# Altium PCB PIC-ENCODER.PcbDoc
Units mm, origin at the board's own origin, x right, y up, seen from the top; angles counter-clockwise.
Board outline 95.12 x 67.48 mm, 2 copper layers (Top Layer, Bottom Layer); 10 components, 14 nets, 83 pads, 0 vias.
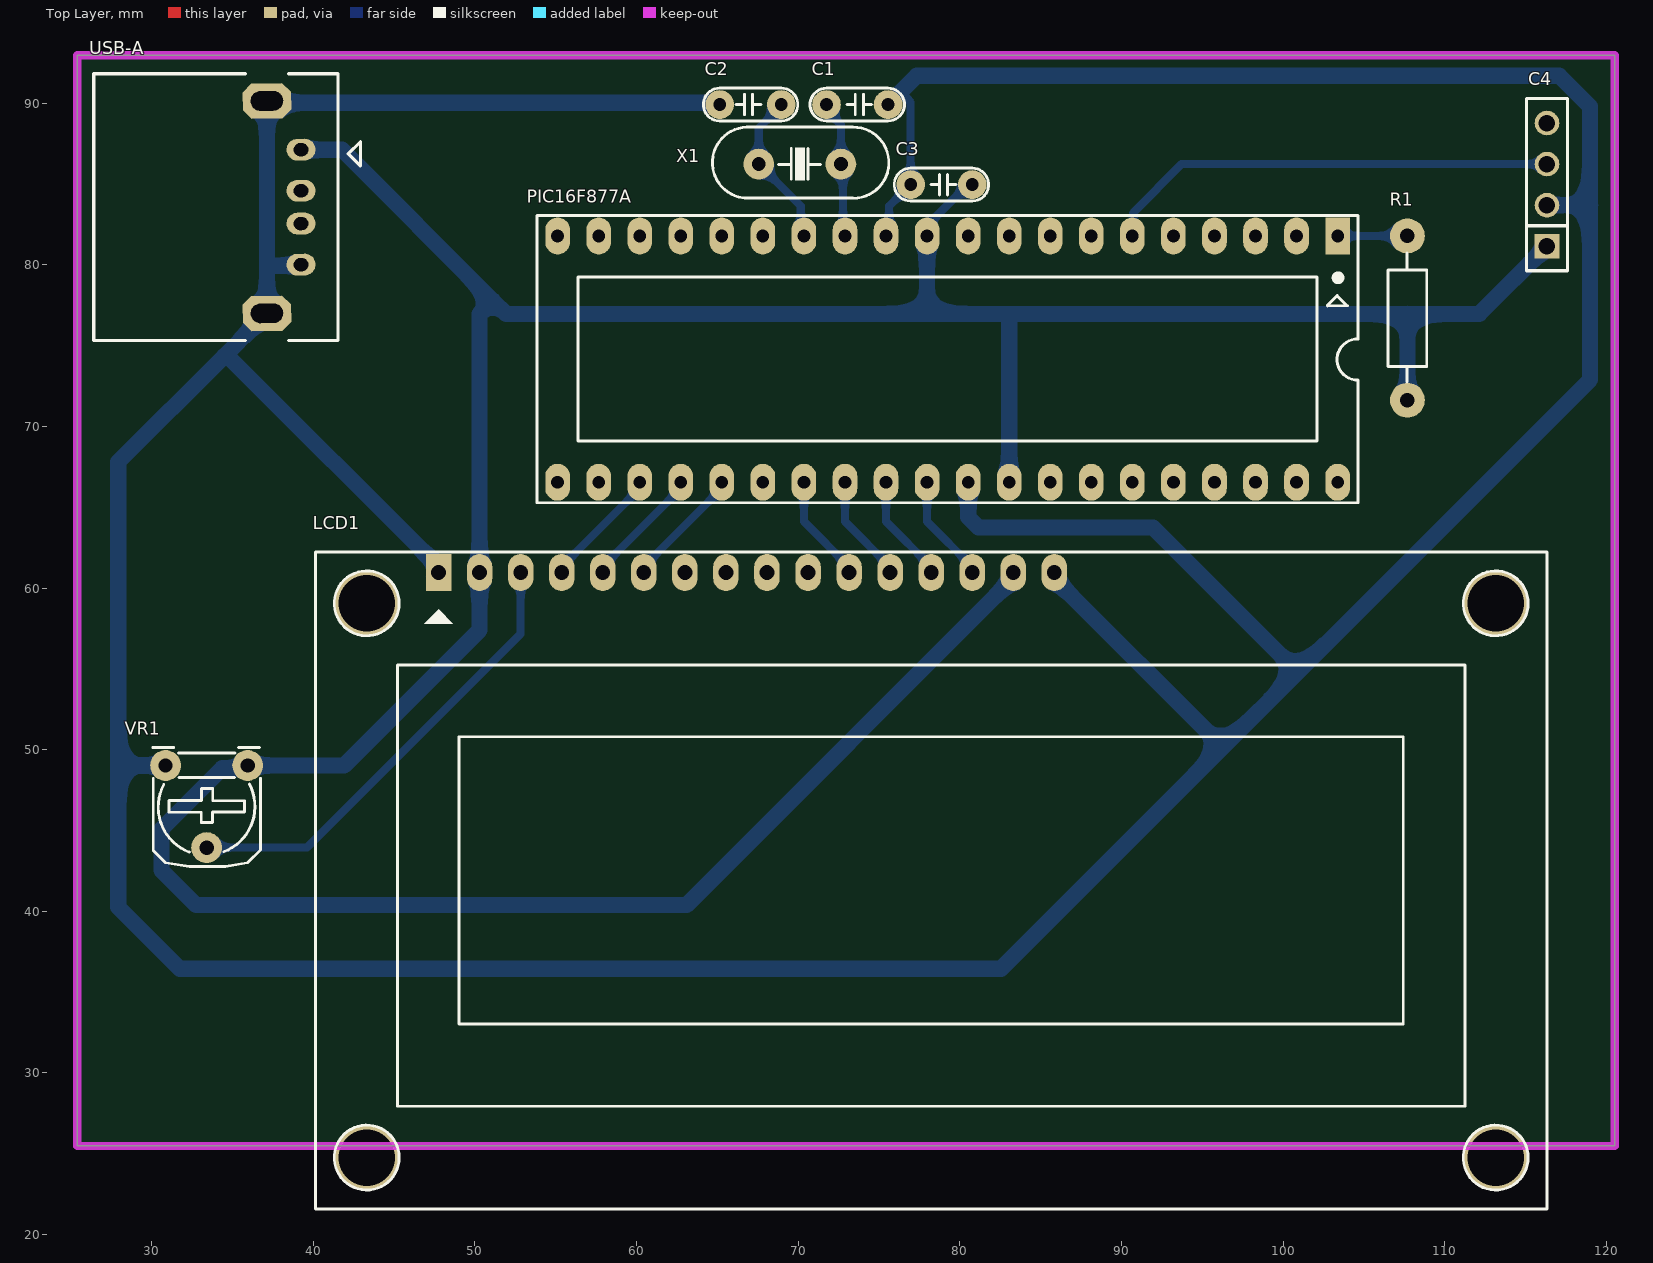
[diagram p0: Top Layer view]
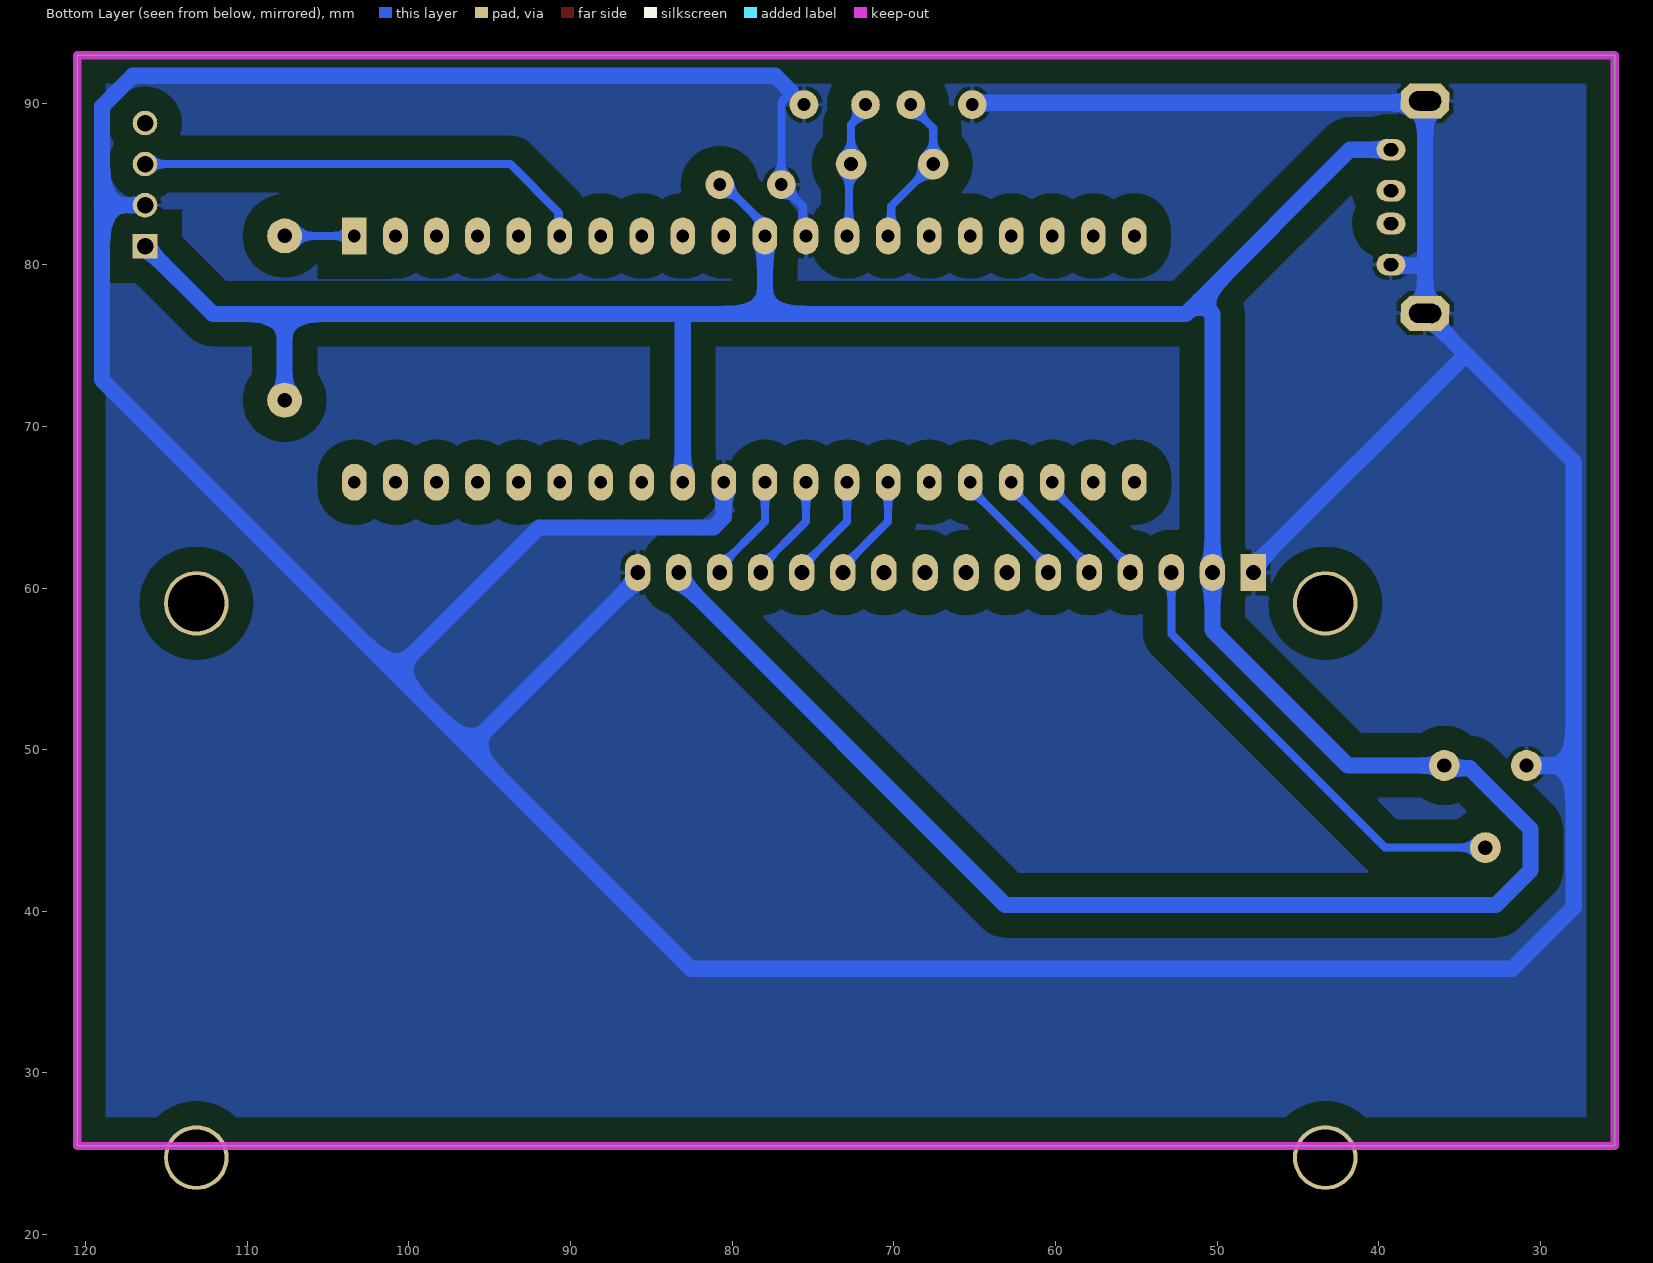
[diagram p1: Bottom Layer view, seen from below]
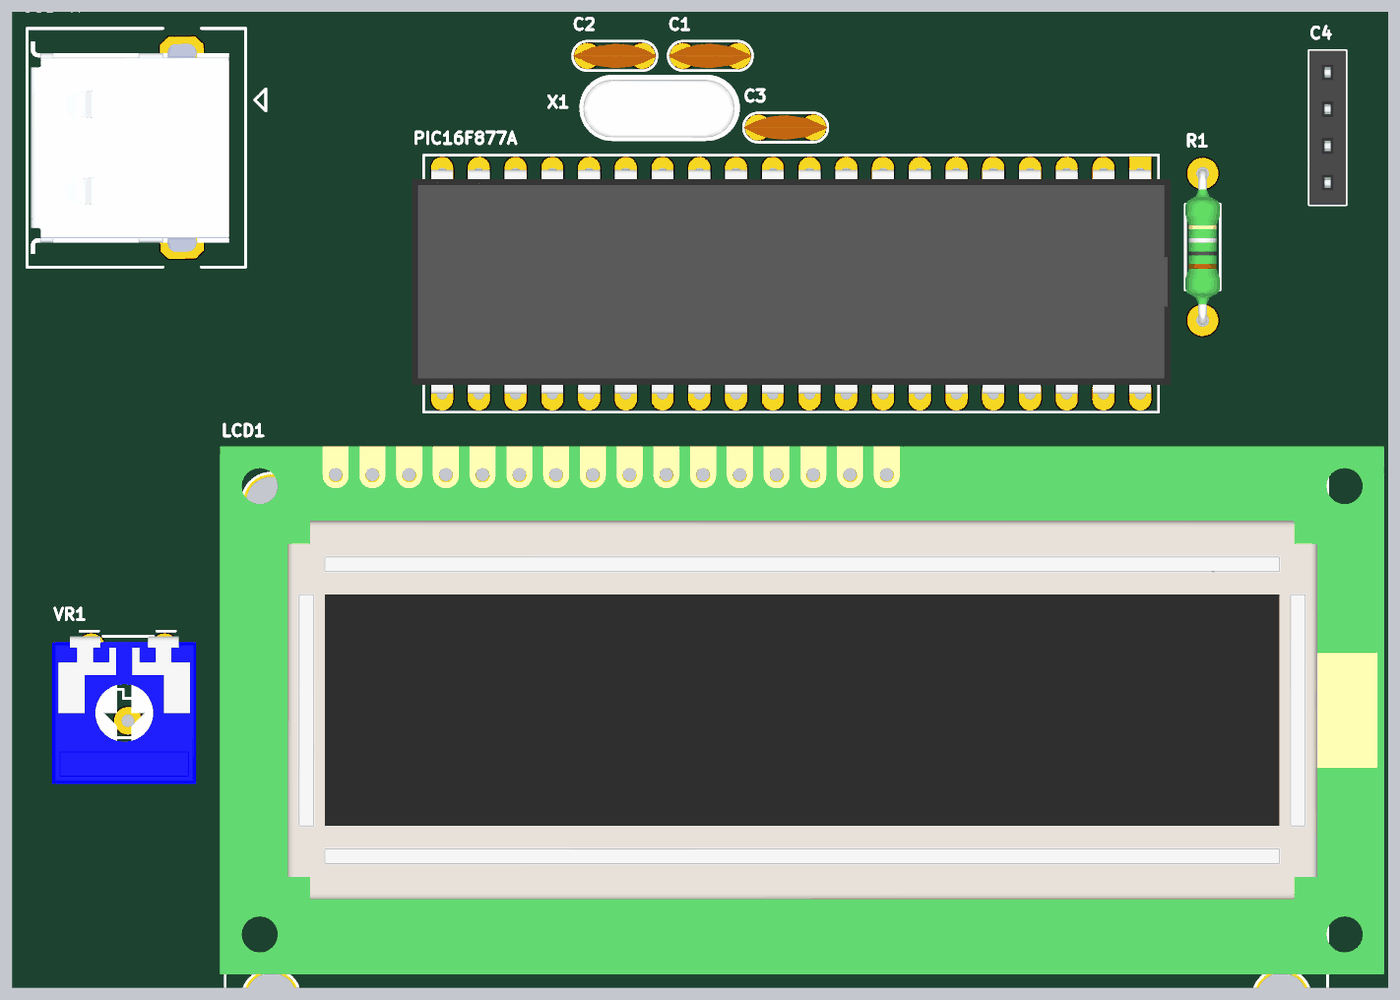
[diagram p2: 3D render of the assembled board from above, using the file's embedded part models]

## Layer stack, top to bottom
Top Solder: solder mask 0.0102, Solder Resist, Dk 3.5
Top Layer: signal copper 0.0356
Dielectric 1: dielectric 0.32, FR-4, Dk 4.8
Bottom Layer: signal copper 0.0356
Bottom Solder: solder mask 0.0102, Solder Resist, Dk 3.5

## Board outline
25.4,25.486 25.4,92.964 120.523,92.964 120.523,25.486

## Design rules (kind name [scope] priority, off if disabled: settings)
Clearance [All] p1: gap=0.5 ignorepadtopadclearanceinfootprint=FALSE
PolygonConnect [All] p1: connectstyle=Relief reliefconductorwidth=0.254 reliefentries=4 polygonreliefangle="90 Angle" airgapwidth=0.254
RoutingVias [All] p1: holewidth=0.3 width=1.27 viastyle="Through Hole" minholewidth=0.3 minwidth=1.27 maxholewidth=0.711 maxwidth=1.27
SolderMaskExpansion [All] p1: expansion=0.102 istentingtop=FALSE
Width [All] p1: maxlimit=1 minlimit=0.4 preferedwidth=0.5
30 further rules are at their usual default settings.

## Components (designator, comment, footprint, x,y, rotation, side; value= is the part's Value field where it differs from the comment)
C1 "22nF" CN1.5 73.787,89.916 r180 top value=33pF
C2 "22nF" CN1.5 66.929,89.916 r0 top value=33pF
C3 "100nF" CN1.5 78.994,84.963 r180 top value=33pF
C4 "JP4" JP4-C1T 116.332,81.153 r90 top
LCD1 "LCD 16x2A" LCD16X2 47.752,60.96 r0 top value=LCD16x2A
PIC16F877A "PIC 16F877A" DIP40/W0.6 103.378,81.788 r180 top value=PIC16F877A
R1 "10K" RES-1/4W 107.569,76.327 r270 top
USB-A "8492121" USB-C1 34.925,83.693 r90 top
VR1 "10K" VR-S2 35.941,49.022 r180 top value="Volume 50k"
X1 "20Mhz" XT2 70.104,86.233 r0 top value=4Mhz

## Footprints (in the part's own frame and the unit in brackets; to place one, negate y for a bottom-side part, rotate by r counter-clockwise, add the part's x,y. Pads: shape width x height; smd on the part's side, far side on the other; paste and mask are expansions set on the pad)
CN1.5 [mil]
  round 70 hole 31: 1(-70,0) 2(80,0)
  silkscreen extent -110,-40 120,40, body extent -110,-33 120,33, height 235
DIP40/W0.6 [mil] "40 PIN, W 600mil, Pin to pin 100mil"
  rect 60x90 hole 31: 1(0,0)
  oval 60x90 hole 31: 2(100,0) 3(200,0) 4(300,0) 5(400,0) 6(500,0) 7(600,0) 8(700,0) 9(800,0) 10(900,0) 11(1000,0) 12(1100,0) 13(1200,0) 14(1300,0) 15(1400,0) 16(1500,0) 17(1600,0) 18(1700,0) 19(1800,0) 20(1900,0) 21(1900,600) 22(1800,600) 23(1700,600) 24(1600,600) 25(1500,600) 26(1400,600) 27(1300,600) 28(1200,600) 29(1100,600) 30(1000,600) 31(900,600) 32(800,600) 33(700,600) 34(600,600) 35(500,600) 36(400,600) 37(300,600) 38(200,600) 39(100,600) 40(0,600)
  silkscreen extent -50,-50 1950,650, body extent -82,-10 1982,600, height 224
JP4-C1T [mm] "4 row, straight, gold plating"
  rect 1.52x1.52 hole 1.02: 1(0,0)
  round 1.52 hole 1.02: 2(2.54,0) 3(5.08,0) 4(7.62,0)
  silkscreen extent -1.52,-1.27 9.14,1.27, body extent -1.52,-1.25 9.14,1.25, height 8.51
LCD16X2 [mil] "LCD dipslay 16x2, 16 pin"
  rect 62x90 hole 36: 1(0,0)
  oval 62x90 hole 36: 2(100,0) 3(200,0) 4(300,0) 5(400,0) 6(500,0) 7(600,0) 8(700,0) 9(800,0) 10(900,0) 11(1000,0) 12(1100,0) 13(1200,0) 14(1300,0) 15(1400,0) 16(1500,0)
  round 157.48 hole 137.8: "Hole 0"(-175,-1425) "Hole 0"(-175,-75) "Hole 0"(2575,-75) "Hole 0"(2575,-1425)
  silkscreen extent -300,-1550 2700,50, body extent -315,-1360 2855,77, height 414
RES-1/4W [mil]
  round 85 hole 35: 1(-215,5) 2(185,5)
  silkscreen extent -173,-42 141,52, body extent -227,-42 197,52, height 95
USB-C1 [mm] "THT, USB 2.0 A Connector, 4Pin, Body 15.8 x14.5mm"
  oval 1.35x1.8 hole 0.8 slot 0.9 at 90.92 deg rot 0.92: 1(3.429,-4.318) 2(0.889,-4.318) 3(-1.143,-4.318) 4(-3.683,-4.318)
  oct 2.2x3 hole 1.2 slot 2 at 90.92 deg rot 0.92: 4(-6.697,-2.206) 4(6.443,-2.206)
  silkscreen extent -8.38,-8 8.13,8.51, body extent -8.03,-5.46 7.77,8.24, height 6.97
VR-S2 [mil] "Resistor Variable"
  round 75 hole 35: 1(0,0) 2(100,200) 3(200,0)
  silkscreen extent -31,-44 231,246, body extent -87,-30 307,372, height 165
XT2 [mil] "Footpin for Crystal 2 pin"
  round 75 hole 34: 1(-100,0) 2(100,0)
  silkscreen extent -213,-83 217,90, body extent -216,-87 216,90, height 144

## Part data
C1 C2 C3: library part CN
C4: "WR-PHD 2.54 mm Angled Socket Header", Manufacturer="W¨¹rth Elektronik eiSos GmbH", partNo=613004143121, ComponentLink1 Description=Manufacturer, ComponentLink1URL=http://www.we-online.com, ComponentLink2 Description=Datasheet, ComponentLink2URL=http://katalog.we-online.de/em/datasheet/6130xx143121.pdf, Created by="Karrer Zheng", Created Date="29 March 2013", NoPins=04
LCD1: library part LCD16x2A, "LCD dipslay 16 char, 2 line"
PIC16F877A: library part PIC16F877-PU, "8K FLASH, 368B RAM, 256B EFROM", Copyright by=VanDungEvn
R1: library part Res, "Res", Manufacturer="Generic Components", Class=Passive, Published=08/06/2000, Publisher="Altium Hobart Technology Centre", SubClass=R
USB-A: library part USB-4, "THT USB 2.0 A Connector WE-EPLE", Manufacturer="Würth Elektronik eiSos GmbH", ComponentLink1Description=Manufacturer, ComponentLink1URL=http://www.we-online.de, ComponentLink2Description=Datasheet, ComponentLink2URL=http://www.we-online.de/katalog/media/pdf/8492121.pdf, Created by="Christin Otto", Created Date=OCT-2014, partNo=8492121
VR1: library part VR-S, "Var Resistor"
X1: library part XT2, "Crystal, 32.768 KHz, -40 to 85 degC, 3.2 x 1.5 x 0.9 mm SMD"

## Nets (pads, with @x,y where several pads share a name; then routed paths per layer and width w, separated by ;. In a path a pad name is that pad's centre, name@x,y a point inside that pad or via, vN(x,y) a via of type N, cw(c..) or ccw(c..) an arc to the next point about the centre after c; other vN are vias at no path point)
5V: C3.1 C4.1 LCD1.2 LCD1.15 PIC16F877A.11 PIC16F877A.32 R1.2 USB-A.1 VR1.1 | length 218.5
  Bottom Layer w0.5: PIC16F877A.11 77.978,82.423 80.518,84.963 C3.1
  Bottom Layer w1: USB-A.1 41.783,87.122 51.117,77.787 ; PIC16F877A.11 77.978,76.962 ; PIC16F877A.32 83.058,76.835 82.931,76.962 ; LCD1.15 83.312,60.604 63.094,40.386 32.766,40.386 30.607,42.545 30.607,45.085 34.371,48.849 35.768,48.849 VR1.1 41.91,49.022 50.292,57.404 LCD1.2 50.292,76.962 51.117,77.787 ; R1.2 107.696,76.962 ; C4.1 112.141,76.962 107.696,76.962 ; 51.117,77.787 51.943,76.962 77.978,76.962 ; 77.978,76.962 82.931,76.962 ; 82.931,76.962 107.696,76.962
D4: LCD1.11 PIC16F877A.27 | length 6.7
  Bottom Layer w0.5: PIC16F877A.27 70.358,64.11 73.152,61.316 LCD1.11
D5: LCD1.12 PIC16F877A.28 | length 6.7
  Bottom Layer w0.5: PIC16F877A.28 72.898,64.11 75.692,61.316 LCD1.12
D6: LCD1.13 PIC16F877A.29 | length 6.7
  Bottom Layer w0.5: PIC16F877A.29 75.438,64.11 78.232,61.316 LCD1.13
D7: LCD1.14 PIC16F877A.30 | length 6.7
  Bottom Layer w0.5: PIC16F877A.30 77.978,64.11 80.772,61.316 LCD1.14
E: LCD1.6 PIC16F877A.25 | length 7.6
  Bottom Layer w0.5: LCD1.6 60.452,61.328 65.278,66.154 PIC16F877A.25
GND: C1.1 C2.1 C3.2 C4.2 LCD1.1 LCD1.16 PIC16F877A.12 PIC16F877A.31 USB-A.4 VR1.3 | length 328.6
  Bottom Layer w0.5: PIC16F877A.12 75.634,81.984 75.634,83.635 C3.2 76.962,90.043 76.327,90.678
  Bottom Layer w1: VR1.3 27.94,49.022 ; USB-A.4@39.243,80.01 39.172,79.939 37.187,79.939 37.131,79.883 ; LCD1.1 47.752,61.316 34.716,74.352 34.487,74.352 ; C2.1 65.038,90.029 37.238,90.029 37.131,90.136 37.131,79.883 ; 76.327,90.678 77.343,91.694 117.094,91.694 118.999,89.789 118.999,83.693 ; PIC16F877A.31 80.518,64.389 81.153,63.754 91.948,63.754 100.901,54.8 ; LCD1.16 85.852,60.579 96.266,50.165 ; C4.2 118.999,83.693 ; 27.94,49.022 27.94,67.805 34.487,74.352 ; 27.94,49.022 27.94,40.259 31.75,36.449 82.55,36.449 96.266,50.165 ; 34.487,74.352 36.388,76.253 36.388,76.381 37.003,76.996 37.131,76.996 37.131,79.883 ; 96.266,50.165 100.901,54.8 ; 100.901,54.8 118.999,72.898 118.999,83.693
INPUT: C4.3 PIC16F877A.6 | length 28.3
  Bottom Layer w0.5: PIC16F877A.6 90.739,81.849 90.739,83.246 93.726,86.233 C4.3
NetC1_2: C1.2 PIC16F877A.13 X1.2 | length 8.6
  Bottom Layer w0.5: C1.2 71.755,89.57 72.644,88.681 X1.2 72.771,86.106 72.771,81.915 PIC16F877A.13
NetC2_2: C2.2 PIC16F877A.14 X1.1 | length 9.9
  Bottom Layer w0.5: C2.2 68.961,89.854 67.564,88.457 X1.1 70.162,83.635 70.162,81.984 PIC16F877A.14
NetLCD1_3: LCD1.3 VR1.2 | length 28.7
  Bottom Layer w0.5: VR1.2 39.624,43.942 52.832,57.15 LCD1.3
NetPIC16F877A_1: PIC16F877A.1 R1.1 | length 4.3
  Bottom Layer w0.5: PIC16F877A.1 R1.1
R/W: LCD1.5 PIC16F877A.24 | length 7.6
  Bottom Layer w0.5: LCD1.5 57.912,61.328 62.738,66.154 PIC16F877A.24
RS: LCD1.4 PIC16F877A.23 | length 7.6
  Bottom Layer w0.5: LCD1.4 55.372,61.328 60.198,66.154 PIC16F877A.23
pads on no net: "LCD1.Hole 0" C4.4 LCD1.7 LCD1.8 LCD1.9 LCD1.10 PIC16F877A.2 PIC16F877A.3 PIC16F877A.4 PIC16F877A.5 PIC16F877A.7 PIC16F877A.8 PIC16F877A.9 PIC16F877A.10 PIC16F877A.15 PIC16F877A.16 PIC16F877A.17 PIC16F877A.18 PIC16F877A.19 PIC16F877A.20 PIC16F877A.21 PIC16F877A.22 PIC16F877A.26 PIC16F877A.33 PIC16F877A.34 PIC16F877A.35 PIC16F877A.36 PIC16F877A.37 PIC16F877A.38 PIC16F877A.39 PIC16F877A.40 USB-A.2 USB-A.3

## Polygon pours and split planes (outlines as drawn)
GND on Bottom Layer "GND_L02_P000" (solid, pour order 0): 25.4,25.4 25.4,92.964 120.523,92.964 120.523,25.4

## Keep-outs
Keep-Out Layer:
  the board outline again, w0.5